# Altium PCB PCB1.PcbDoc
Units mil, origin at the board's own origin, x right, y up, seen from the top; angles counter-clockwise.
Board outline 3765 x 2830 mil, 2 copper layers (Top Layer, Bottom Layer); 31 components, 46 nets, 177 pads, 8 vias.
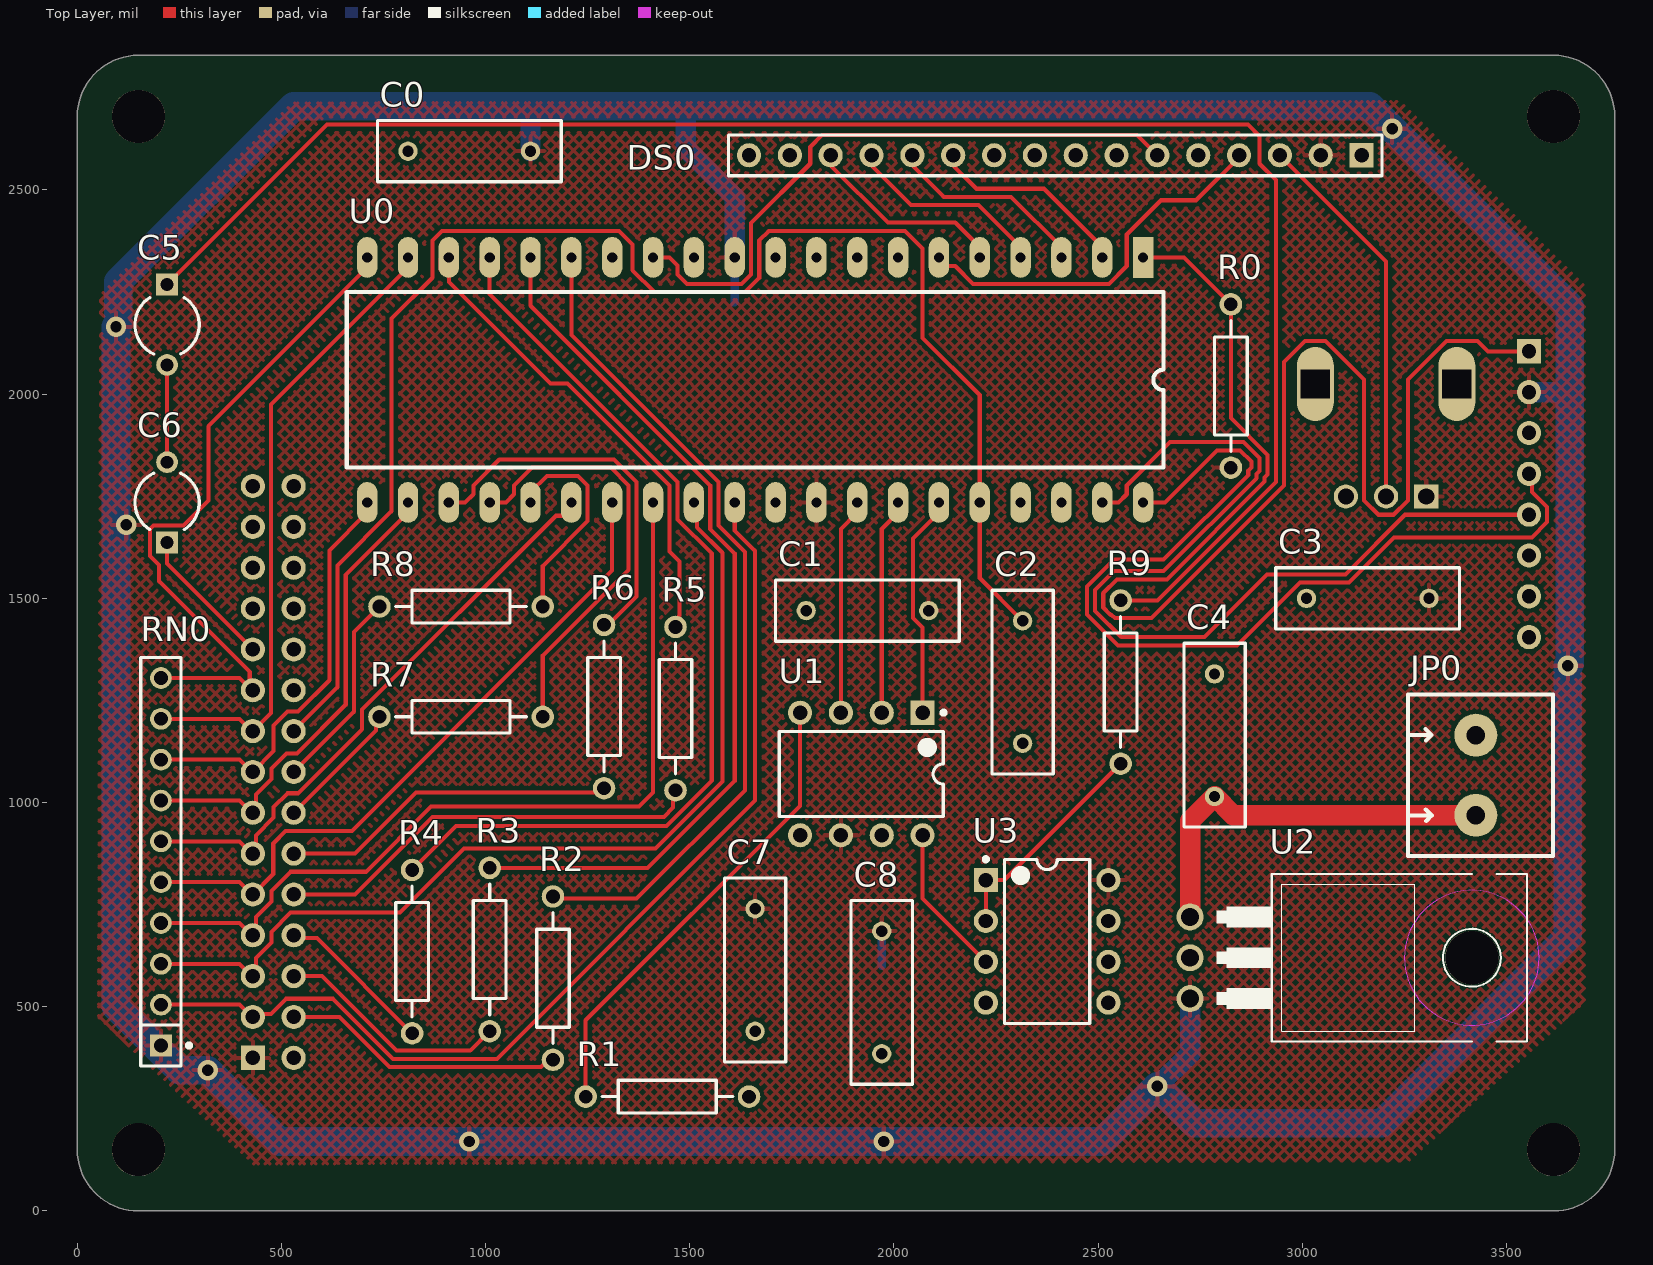
[diagram p0: Top Layer view]
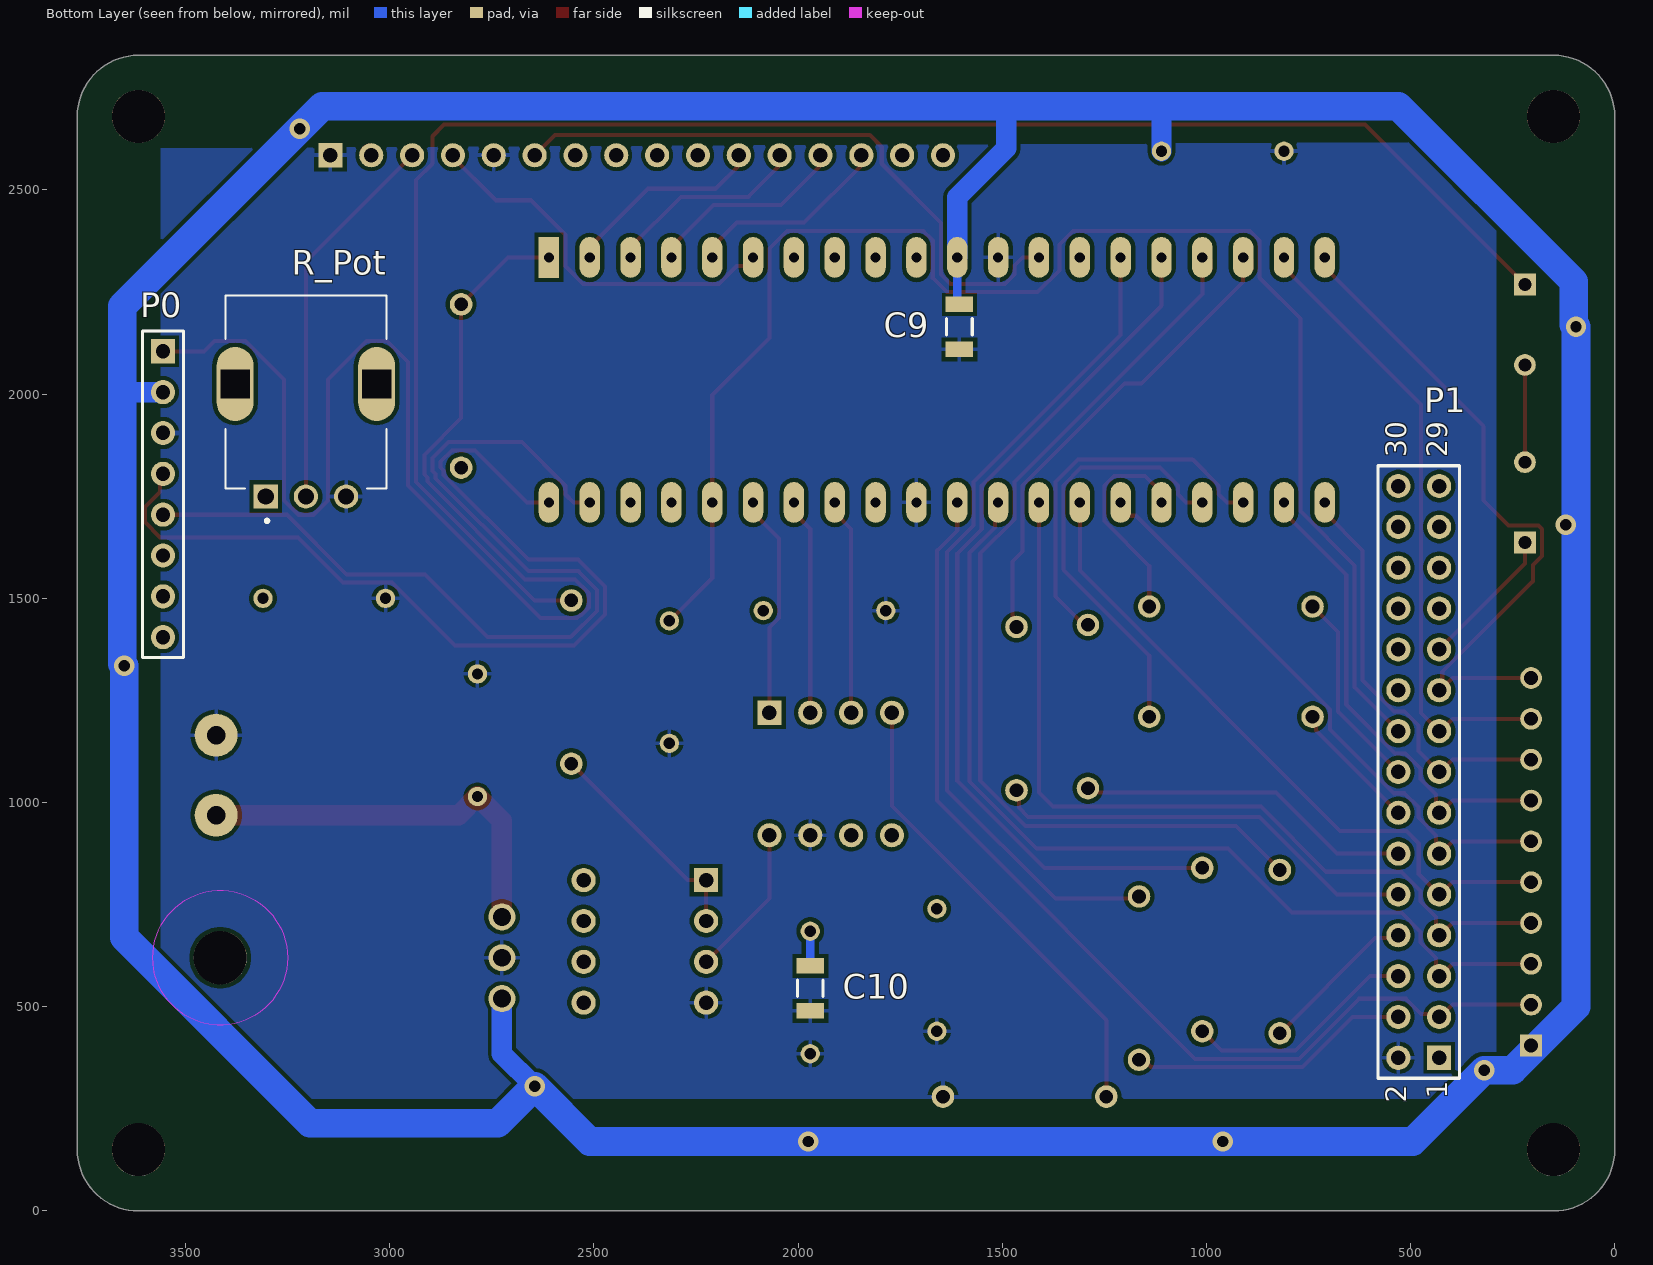
[diagram p1: Bottom Layer view, seen from below]

## Layer stack, top to bottom
Top Solder: solder mask 0.4, Solder Resist, Dk 3.5
Top Layer: signal copper 1.4
Dielectric 1: dielectric 12.6, FR-4, Dk 4.8
Bottom Layer: signal copper 1.4
Bottom Solder: solder mask 0.4, Solder Resist, Dk 3.5

## Board outline
0,150 0,2680 cw(c150,2680) 150,2830 3615,2830 cw(c3615,2680) 3765,2680 3765,150 cw(c3615,150) 3615,0 150,0 cw(c150,150)

## Design rules (kind name [scope] priority, off if disabled: settings)
Clearance [All] p1: gap=10 ignorepadtopadclearanceinfootprint=FALSE except(0: Arc-Hole Track-Hole SMDPad-Hole THPad-Hole Via-Hole Fill-Hole Poly-Hole Region-Hole Text-Hole)
HoleSize [All] p1: absolutevalues=TRUE maxlimit=200 minlimit=1 maxpercent=80.000 minpercent=20.000
PolygonConnect [All] p1: connectstyle=Relief reliefconductorwidth=10 reliefentries=4 polygonreliefangle="90 Angle" airgapwidth=10
RoomDefinition final [InComponentClass('final')] p1: confinementstyle=ConfineIn formatcopy=TRUE lockcomponents=FALSE outline 620,125 3670,125 3670,2245 620,2245
RoutingVias [All] p1: holewidth=28 width=50 viastyle="Through Hole" minholewidth=28 minwidth=50 maxholewidth=28 maxwidth=50
SilkToSolderMaskClearance [IsPad] p1: minsilkscreentomaskgap=2 clearancetoexposedcopper=TRUE
SolderMaskExpansion [All] p1: expansion=4 istentingtop=FALSE
Width [All] p1 off: maxlimit=10 minlimit=10 preferedwidth=10
28 further rules are at their usual default settings.

## Components (designator, comment, footprint, x,y, rotation, side; value= is the part's Value field where it differs from the comment)
C0 "Cap" RAD-0.3 960,2595 r180 top value=0.1uF
C1 "Cap" RAD-0.3 1935,1470 r0 top value=0.1uF
C2 "Cap" RAD-0.3 2315,1295 r90 top value=0.1uF
C3 "Cap" RAD-0.3 3160,1500 r0 top value=0.1uF
C4 "Cap" RAD-0.3 2785,1165 r270 top value=0.33uF
C5 "Cap2" CAPR5-4X5 220,2170 r270 top value=100uF
C6 "Cap2" CAPR5-4X5 220,1735 r90 top value=100uF
C7 "Cap" RAD-0.3 1660,590 r270 top value=0.1uF
C8 "Cap" RAD-0.3 1970,535 r270 top value=0.1uF
C9 "Cap_Kemet_C1206C476M8PACTU_eec" Kemet_C1206C476M8PACTU_0 1605,2165 r270 bottom value=47µF
C10 "Cap_Kemet_C1206C476M8PACTU_eec" Kemet_C1206C476M8PACTU_0 1970,545 r270 bottom value=47µF
DS0 "LCD 44780" HDR1X16 3145,2585 r180 top
JP0 "Power Port" CON2screw 3425,1165 r270 top
P0 "Mplab SNAP" HDR1X8 3555,2105 r270 bottom
P1 "Header 15X2" HDR2X15 430,375 r90 bottom
R0 "Res2" AXIAL-0.4 2825,2020 r90 top value=1K
R1 "Res2" AXIAL-0.4 1445,280 r0 top value=1K
R2 "Res2" AXIAL-0.4 1165,570 r90 top value=510
R3 "Res2" AXIAL-0.4 1010,640 r90 top value=510
R4 "Res2" AXIAL-0.4 820,635 r90 top value=510
R5 "Res2" AXIAL-0.4 1465,1230 r90 top value=510
R6 "Res2" AXIAL-0.4 1290,1235 r90 top value=510
R7 "Res2" AXIAL-0.4 940,1210 r0 top value=510
R8 "Res2" AXIAL-0.4 940,1480 r0 top value=510
R9 "Res2" AXIAL-0.4 2555,1295 r90 top value=100
R_Pot "PT01-D125K2-B103" TRIM_PT01-D125K2-B103 3205,2025 r180 bottom
RN0 "4610X-102-102LF" SIP249W51P254L2535H508Q10P 205,855 r180 top
U0 "PIC18F47K40-I/P" DIP-40 2610,2335 r270 top
U1 "LT1661" LT-N8 1920,1070 r270 top
U2 "LM7805T" TO220 2975,620 r270 top
U3 "LT1490CN8" LT-N8-8 2375,660 r0 top

## Footprints (in the part's own frame and the unit in brackets; to place one, negate y for a bottom-side part, rotate by r counter-clockwise, add the part's x,y. Pads: shape width x height; smd on the part's side, far side on the other; paste and mask are expansions set on the pad)
AXIAL-0.4 [mm] "Axial Device, Thru-Hole; 2 Leads; 0.4 in Pin Spacing"
  round 1.4 hole 0.85: 1(-5.08,0) 2(5.08,0)
  silkscreen extent -4.06,-1.02 4.06,1.02
CAPR5-4X5 [mm] "Capacitor; 2 Leads"
  rect 1.35x1.35 hole 0.8: 1(-2.5,0)
  round 1.35 hole 0.8: 2(2.5,0)
  silkscreen extent -1.69,-2 1.82,2
CON2screw [mil]
  round 105 hole 45: 1(0,0) 2(196,0)
  silkscreen extent -100,-166 296,189
DIP-40 [mil]
  rect 100x50 hole 25: 1(0,0)
  oval 100x50 hole 25: 2(0,-100) 3(0,-200) 4(0,-300) 5(0,-400) 6(0,-500) 7(0,-600) 8(0,-700) 9(0,-800) 10(0,-900) 11(0,-1000) 12(0,-1100) 13(0,-1200) 14(0,-1300) 15(0,-1400) 16(0,-1500) 17(0,-1600) 18(0,-1700) 19(0,-1800) 20(0,-1900) 21(600,-1900) 22(600,-1800) 23(600,-1700) 24(600,-1600) 25(600,-1500) 26(600,-1400) 27(600,-1300) 28(600,-1200) 29(600,-1100) 30(600,-1000) 31(600,-900) 32(600,-800) 33(600,-700) 34(600,-600) 35(600,-500) 36(600,-400) 37(600,-300) 38(600,-200) 39(600,-100) 40(600,0)
  silkscreen extent 85,-1950 515,50
HDR1X8 [mm]
  rect 1.5x1.5 hole 0.9: 1(0,0)
  round 1.5 hole 0.9: 2(2.54,0) 3(5.08,0) 4(7.62,0) 5(10.16,0) 6(12.7,0) 7(15.24,0) 8(17.78,0)
  silkscreen extent -1.27,-1.27 19.05,1.27
HDR1X16 [mm] "Connector; Header; 16 Position"
  rect 1.5x1.5 hole 0.9: 1(0,0)
  round 1.5 hole 0.9: 2(2.54,0) 3(5.08,0) 4(7.62,0) 5(10.16,0) 6(12.7,0) 7(15.24,0) 8(17.78,0) 9(20.32,0) 10(22.86,0) 11(25.4,0) 12(27.94,0) 13(30.48,0) 14(33.02,0) 15(35.56,0) 16(38.1,0)
  silkscreen extent -1.27,-1.27 39.37,1.27
HDR2X15 [mm] "Connector; Header; 15x2 Position"
  rect 1.5x1.5 hole 0.9: 1(0,0)
  round 1.5 hole 0.9: 2(0,2.54) 3(2.54,0) 4(2.54,2.54) 5(5.08,0) 6(5.08,2.54) 7(7.62,0) 8(7.62,2.54) 9(10.16,0) 10(10.16,2.54) 11(12.7,0) 12(12.7,2.54) 13(15.24,0) 14(15.24,2.54) 15(17.78,0) 16(17.78,2.54) 17(20.32,0) 18(20.32,2.54) 19(22.86,0) 20(22.86,2.54) 21(25.4,0) 22(25.4,2.54) 23(27.94,0) 24(27.94,2.54) 25(30.48,0) 26(30.48,2.54) 27(33.02,0) 28(33.02,2.54) 29(35.56,0) 30(35.56,2.54)
  silkscreen extent -1.27,-1.27 36.83,3.81
Kemet_C1206C476M8PACTU_0 [mm]
  rect 0.95x1.7 smd paste+0 mask+0: 1(-1.4,0) 2(1.4,0)
  silkscreen extent -0.5,-0.8 0.5,0.8, body extent -1.6,-0.8 1.6,0.8, height 1.6
LT-N8 [mm] "DIP, 8-Leads, Body 10.16x6.477mm, Pitch 2.54mm"
  rect 1.5x1.5 hole 0.9: 1(-3.81,3.81)
  round 1.5 hole 0.9: 2(-3.81,1.27) 3(-3.81,-1.27) 4(-3.81,-3.81) 5(3.81,-3.81) 6(3.81,-1.27) 7(3.81,1.27) 8(3.81,3.81)
  silkscreen extent -3.93,-5.1 2.65,5.24, body extent -3.95,-5.07 3.95,5.07, height 2.36
LT-N8-8 [mm] "DIP, 8-Leads, Body 10.16x6.48mm, Pitch 2.54mm"
  rect 1.5x1.5 hole 0.9: 1(-3.81,3.81)
  round 1.5 hole 0.9: 2(-3.81,1.27) 3(-3.81,-1.27) 4(-3.81,-3.81) 5(3.81,-3.81) 6(3.81,-1.27) 7(3.81,1.27) 8(3.81,3.81)
  silkscreen extent -3.93,-5.1 2.65,5.23, body extent -3.95,-5.07 3.95,5.07, height 2.36
RAD-0.3 [mm] "Radial Cap, Thru-Hole; 2 Leads; 0.3 in Pin Spacing"
  round 1.2 hole 0.7: 1(-3.81,0) 2(3.81,0)
  silkscreen extent -5.71,-1.91 5.71,1.91
SIP249W51P254L2535H508Q10P [mm]
  rect 1.35x1.35 hole 0.85: 1(0,11.43)
  round 1.35 hole 0.85: 2(0,8.89) 3(0,6.35) 4(0,3.81) 5(0,1.27) 6(0,-1.27) 7(0,-3.81) 8(0,-6.35) 9(0,-8.89) 10(0,-11.43)
  silkscreen extent -1.88,-12.7 1.25,12.7
TO220 [mil]
  round 66 hole 44: 1(-100,-250) 2(0,-250) 3(100,-250)
  round 130 hole 130 unplated: ""(0,440)
  Keep-Out Layer circle w0: c0,440 r165
  Keep-Out Layer circle w0: c0,440 r165
  silkscreen extent -205,-185 205,575, body extent -200,-68 200,113, height 1155
TRIM_PT01-D125K2-B103 [mm]
  rect 1.508x1.508 hole 1: 1(-2.5,-7)
  round 1.508 hole 1: 2(0,-7) 3(2.5,-7)
  oval 2.3x4.6 hole 1.8 square: S1(-4.4,0) S2(4.4,0)
  silkscreen extent -5,-8.61 5,5.5

## Part data
C0 C1 C2 C3 C4 C5 C6 C7 C8: "Capacitor", Publisher="Altium Limited"
  C0 C1 C2 C3 C4 C7 C8: LatestRevisionDate=17-Jul-2002, LatestRevisionNote="Re-released for DXP Platform.", PackageDescription="Radial Cap, Thru-Hole; 2 Leads; 0.3 in Pin Spacing", PackageReference=RAD-0.3, Published=8-Jun-2000
  C5 C6: PackageDescription="Capacitor; 2 Leads", PackageReference=CAPR5-4X5, Published=23-Sep-2002
C9 C10: "CAP 47µF ±20% 10V Ceramic Capacitor X5R 1206 (3216 Metric)", Capacitance=47µF, Digikey Part Number=399-5508-1-ND, Manufacturer=Kemet, Mouser Part Number=80-C1206C476M8P, Package="1206 (3216 metric)", Part Number=C1206C476M8PACTU, Temperature="-55°C to +85°C", Temperature Range High=+85°C, Temperature Range Low=-55°C, Tolerance=±20%, Voltage=10V, ComponentLink1Description=Upverter, ComponentLink1URL=https://upverter.com/upn/revision/2d48458e614f84a3/, ComponentLink2Description=Datasheet, ComponentLink2URL=https://upverter.com/datasheet/f4907562a9ebe4d70bacce08fab44b779a890536.pdf, Digikey Description="CAP 47µF ±20% 10V Ceramic Capacitor X5R 1206 (3216 Metric)", helpURL=https://upverter.com/upn/revision/2d48458e614f84a3/, Ipc Land Pattern Name=CAPC320160X160, Lead Free=yes, Mounting Type="Surface Mount", Price=0.398824992937, RoHS=TRUE, Supplier 1=Digi-Key, Supplier 2=Mouser, Supplier Part Number 1=399-5508-1-ND, Supplier Part Number 2=80-C1206C476M8P
JP0: library part Power
P0: library part "Header 8", "Header, 8-Pin", LatestRevisionDate=17-Jul-2002, LatestRevisionNote="Re-released for DXP Platform.", Publisher="Altium Limited"
P1: "Header, 15-Pin, Dual row", LatestRevisionDate=17-Jul-2002, LatestRevisionNote="Re-released for DXP Platform.", Publisher="Altium Limited"
R0 R1 R2 R3 R4 R5 R6 R7 R8 R9: "Resistor", LatestRevisionDate=17-Jul-2002, LatestRevisionNote="Re-released for DXP Platform.", PackageDescription="Axial Device, Thru-Hole; 2 Leads; 0.4 in Pin Spacing", PackageReference=AXIAL-0.4, Published=8-Jun-2000, Publisher="Altium Limited"
R_Pot: "10k Ohm 1 Gang Linear Through Hole Potentiometer None 1.0 Kierros Carbon 0.05W, 1/20W PC Pins", Package=None, Availability="In Stock", Check_prices=https://www.snapeda.com/parts/PT01-D125K2-B103/CUI+Devices/view-part/?ref=eda, MF="CUI Devices", MP=PT01-D125K2-B103, Price=None, Purchase-URL=https://pricing.snapeda.com/search/part/PT01-D125K2-B103/?ref=eda, SnapEDA_Link=https://www.snapeda.com/parts/PT01-D125K2-B103/CUI+Devices/view-part/?ref=snap
RN0: "Resistor Network", Manufacturer_Name=Bourns, Mouser Part Number=652-4610X-2LF-1K, Arrow Part Number=4610X-102-102LF, Arrow Price/Stock=https://www.arrow.com/en/products/4610x-102-102lf/bourns, Datasheet Link=https://componentsearchengine.com/Datasheets/2/4610X-102-102LF.pdf, Height=5.08mm, Manufacturer_Part_Number=4610X-102-102LF, Mouser Price/Stock=https://www.mouser.co.uk/ProductDetail/Bourns/4610X-102-102LF?qs=Rl1knRB2A4tCodRie8H8UQ%3D%3D
U0: library part PIC18F4620-I/P_1, "Enhanced Flash Microcontroller with 10-Bit A/D and nanoWatt Technology, 64K Flash, 40-Pin PDIP, Industrial Temperature Range", ComponentLink1Description="Manufacturer URL", ComponentLink1URL=http://www.microchip.com/, ComponentLink2Description=Datasheet, ComponentLink2URL=http://ww1.microchip.com/downloads/en/DeviceDoc/39626e.pdf, ComponentLink3Description="Package Specification", ComponentLink3URL=http://www.microchip.com/stellent/groups/techpub_sg/documents/packagingspec/en012702.pdf, DatasheetVersion="revE, May-2008", PackageDescription="40-Lead Plastic Dual In-Line (P) - 600 mil Body [PDIP]", PackageReference=PDIP600-P40, PackageVersion="revBB, Aug-2009"
U2: Package=None, Availability="Not in stock", Check_prices=https://www.snapeda.com/parts/LM7805T/Texas+Instruments/view-part/?ref=eda, MF="Texas Instruments", MP=LM7805T, Price=None, SnapEDA_Link=https://www.snapeda.com/parts/LM7805T/Texas+Instruments/view-part/?ref=snap
U3: "Dual Channel, Operational Amplifier, RRIO, Over-The-Top, 0.18 MHz Typical GBW, 0.06 V/us Typical SR, 2 to 44 V, 8-Pin DIP (N8-8), Commercial", Linear Technology Part Number=LT1490A, Manufacturer="Linear Technology", Channels (#)=2, ComponentLink1Description=Datasheet, ComponentLink1URL=http://cds.linear.com/docs/Datasheet/14901afd.pdf, ComponentLink2Description="Package Specification", ComponentLink2URL=http://cds.linear.com/docs/Packaging/05081510_I_N8.pdf, DatasheetVersion="Rev. D", GBW (MHz) Typical=0.18, Is (mA) Typical=0.04, Mounting Technology="Surface Mount", PackageDescription="8-Lead PDIP, Body 10.16 x 6.48 mm, Pitch 2.54 mm", PackageReference=LT-N8-8, PackageVersion="Rev I", PartNumber=LT1490CN8, SR (V/us) Typical=0.06, Type=VFB, Vos (mV) Typical=0.11, Vs Max (V)=44, Vs Min (V)=2

## Free pads (board coordinates)
  round 130 hole 130 unplated: ""(150,150) ""(150,2680) ""(3615,150) ""(3615,2680)

## Via types
v1: diameter 50, hole 28, Top Layer to Bottom Layer, 8 vias

## Nets (pads, with @x,y where several pads share a name; then routed paths per layer and width w, separated by ;. In a path a pad name is that pad's centre, name@x,y a point inside that pad or via, vN(x,y) a via of type N, cw(c..) or ccw(c..) an arc to the next point about the centre after c; other vN are vias at no path point)
ADCin: C2.2 P1.18 U0.36 | length 3798
  Top Layer w10: P1.18 637.44,1282.44 637.44,1580.87 770,1713.43 770,2185.15 870,2285.15 870,2376.57 893.43,2400 1326.57,2400 1360,2366.57 1360,2303.43 1413.43,2250 1635,2250 1670,2285 1670,2376.57 1693.43,2400 2026.57,2400 2070,2356.57 2070,2137.52 2210,1997.52 U0.36 2210,1550 C2.2
GND: C0.2 C1.1 C2.1 C3.1 C4.1 C7.2 C8.2 C9.2 C10.2 DS0.1 DS0.5 JP0.1 P0.3 P1.2 R1.2 R_Pot.3 U0.12 U0.31 U1.7 U2.2 U3.4 | length 110.6
  Top Layer w10: U0.12 U0.12@1510,2360 ; U0.31@1710,1710 U0.31 ; C1.1 C1.1@1787.5,1467.5
  Bottom Layer w10: U0.12@1510,2310 U0.12 ; U0.31@1710,1710 U0.31 ; C1.1 C1.1@1787.5,1467.5 ; C3.1 C3.1@3012.5,1502.5
LED0: R2.2 U0.15 | length 2062.9
  Top Layer w10: R2.2 1170,765 1370,765 1635,1030 1635,1613.28 1570,1678.28 1570,1784.85 1210,2144.85 U0.15
LED0c: P1.4 R2.1 | length 693
  Top Layer w10: P1.4 642.6,475 765.16,352.44 1135.23,352.44 1152.79,370 R2.1
LED1: R3.2 U0.16 | length 2177.2
  Top Layer w10: R3.2 1396.72,840 1610,1053.28 1610,1610 1550,1670 1550,1776.57 1110,2216.57 U0.16
LED1c: P1.6 R3.1 | length 575.3
  Top Layer w10: P1.6 599.17,575 781.73,392.44 962.44,392.44 R3.1
LED2: R4.2 U0.17 | length 2356
  Top Layer w10: R4.2 927.44,942.44 1442.59,942.44 1553.86,1053.71 1553.86,1609.57 1470,1693.43 1470,1784.85 1010,2244.85 U0.17 ; U0.17@990,2305 U0.17@990,2330
LED2c: P1.8 R4.1 | length 389.4
  Top Layer w10: P1.8 536.74,668.26 586.74,668.26 R4.1
LED3: R5.2 U0.18 | length 1192.5
  Top Layer w10: U0.18@890,2305 U0.18@890,2330 ; U0.18 910,2275 1159.22,2025.78 1200.78,2025.78 1450,1776.57 1450,1615 1475,1590 1475,1458.42 1473.63,1457.05 1473.63,1438.63 R5.2
LED3c: P1.10 R5.1 | length 1062.2
  Top Layer w10: P1.10 680,775 870,965 1436.86,965 1459.3,987.44 1459.3,1024.3 R5.1
LED4: R6.2 U0.23 | length 932
  Top Layer w10: U0.23 950,1735 970,1755 970,1776.57 1033.43,1840 1314.85,1840 1370,1784.85 1370,1505 1350,1485 R6.2@1290,1425
LED4c: P1.12 R6.1 | length 826.3
  Top Layer w10: P1.12 680,875 830,1025 1280,1025 R6.1
LED5: R7.2 U0.24 | length 1059.4
  Top Layer w10: U0.24 1050,1735 1070,1755 1070,1776.57 1113.43,1820 1306.57,1820 1350,1776.57 1350,1570 1140,1360 R7.2
LED5c: P1.14 R7.1 | length 322
  Top Layer w10: P1.14 731.37,1176.37 731.37,1201.37 R7.1
LED6: R8.2 U0.25 | length 533.4
  Top Layer w10: U0.25 1110,1760 1150,1800 1226.57,1800 1250,1776.57 1250,1689.39 1140,1579.39 R8.2
LED6c: P1.16 R8.1 | length 492
  Top Layer w10: P1.16 677.44,1222.44 677.44,1417.44 R8.1
NetC4_2: C4.2 JP0.2 U2.1 | length 978.9
  Top Layer w50: U2.1 2725,955 C4.2 2831,969 JP0.2
NetC5_1: C5.1 R9.2 | length 4212.3
  Top Layer w10: C5.1 611.57,2660 2866.59,2660 2895,2631.59 2895,2564.29 2935,2524.29 2935,1784.96 2645.04,1495 R9.2
NetC5_2: C5.2 C6.2 | length 238.1
  Top Layer w10: C6.2 C5.2
NetDS0_3: DS0.3 R_Pot.2 | length 943.3
  Top Layer w10: DS0.3 3205,2325 R_Pot.2
NetDS0_4: DS0.4 U0.6 | length 941.2
  Top Layer w10: U0.6 2110,2331.91 2128.48,2313.43 2150,2313.43 2193.43,2270 2526.57,2270 2570,2313.43 2570,2391.21 2653.65,2474.87 2739.87,2474.87 DS0.4@2847.5,2582.5
NetDS0_6: DS0.6 U0.13 | length 1554.1
  Top Layer w10: U0.13@1416.85,2341.85 U0.13 1450,2335 1470,2315 1470,2293.43 1493.43,2270 1626.57,2270 1650,2293.43 1650,2419.29 1795,2564.29 1795,2605.71 1824.29,2635 2595,2635 DS0.6
NetDS0_11: DS0.11 U0.2 | length 497.8
  Top Layer w10: DS0.11 2145,2560 2201.91,2503.09 2366.91,2503.09 2510,2360 U0.2
NetDS0_12: DS0.12 U0.3 | length 497.8
  Top Layer w10: DS0.12 2045,2560 2121.91,2483.09 2286.91,2483.09 2410,2360 U0.3
NetDS0_13: DS0.13 U0.4 | length 497.8
  Top Layer w10: DS0.13 1945,2560 2041.91,2463.09 2206.91,2463.09 2310,2360 U0.4
NetDS0_14: DS0.14 U0.5 | length 497.8
  Top Layer w10: DS0.14 1845,2560 1985,2420 2150,2420 2210,2360 U0.5
NetP0_1: P0.1 R0.2 U0.1 | length 3500.7
  Top Layer w10: 2527.62,1462.19 ccw(c2534.66,1469.3) 2529.26,1460.88 2530.29,1460.22 2530.57,1460.04 ; 2527.59,1462.23 2512.44,1477.37 2512.44,1512.63 2546.48,1546.67 2668.43,1546.67 2907.56,1785.8 2907.56,1795.99 2915,1803.43 2915,1851.57 2825,1941.57 R0.2 2710,2335 U0.1 ; 2530.61,1460.02 2532.11,1459.06 cw(c2526.71,1450.63) 2532.45,1458.83 ; 2532.47,1458.81 2541.51,1452.44 2630.77,1452.44 2955,1776.68 2955,2078.75 3006.81,2130.55 3056.74,2130.55 3151.26,2036.03 3151.26,1739.96 3186.49,1704.72 3223.51,1704.72 3258.74,1739.95 3258.74,2036.03 3353.26,2130.55 3429.09,2130.55 3454.64,2105 P0.1
NetP0_4: P0.4 U0.40 | length 2400.3
  Top Layer w10: U0.40@2628.48,1704.22 2610,1722.69 U0.40 2663.28,1735 2790.84,1862.56 2847.44,1862.56 2875,1835 2875,1820 2867.56,1812.56 2867.56,1802.37 2660.19,1595 2538.24,1595 2472.44,1529.2 2472.44,1460.8 2548.24,1385 2840.38,1385 2994,1538.62 3113.97,1538.62 3224.88,1649.53 3562.5,1649.53 3599.53,1686.56 3599.53,1723.44 3562.5,1760.47 3562.5,1797.5 P0.4
NetP0_5: P0.5 U0.39 | length 2300.8
  Top Layer w10: U0.39 2550,1735 2570,1755 2570,1776.57 2675.99,1882.56 2855.73,1882.56 2895,1843.28 2895,1811.72 2887.56,1804.27 2887.56,1794.09 2660.14,1566.67 2538.2,1566.67 2492.44,1520.91 2492.44,1469.09 2556.53,1405 2760,1405 2913.62,1558.62 3105.69,1558.62 3251.79,1704.72 3554.72,1704.72 P0.5
NetR1_1: R1.1 U1.4 | length 1157.5
  Top Layer w10: R1.1 1245,466.97 1770,991.97 U1.4
NetR9_1: R9.1 U3.1 U3.2 | length 548.1
  Top Layer w10: U3.2 U3.1 2270,810 R9.1
NetU0_33: U0.33 U1.3 | length 531.6
  Top Layer w10: U1.3 1870,1670 1910,1710 U0.33
NetU0_34: U0.34 U1.2 | length 531.6
  Top Layer w10: U1.2 1970,1670 2010,1710 U0.34
NetU0_35: U0.35 U1.1 | length 551.1
  Top Layer w10: U1.1 2070,1428.23 2046.38,1451.85 2046.38,1646.38 2110,1710 U0.35
NetU1_8: U1.8 U3.3 | length 374.2
  Top Layer w10: U1.8 2070,765 U3.3
SPKR: C6.1 P1.21 | length 348.6
  Top Layer w10: C6.1 220,1585 P1.21
SW0: P1.3 RN0.2 U0.30 | length 2559.5
  Top Layer w10: RN0.2 397.03,505 427.03,475 P1.3 437.5,482.5 474.53,482.5 511.56,519.53 626.36,519.53 773.45,372.44 1027.44,372.44 1660,1005 1660,1616.57 1610,1666.57 U0.30
SW1: P1.5 RN0.3 U0.29 | length 2334.1
  Top Layer w10: RN0.3 397.03,605 427.03,575 P1.5 437.5,582.5 437.5,619.53 475.47,657.5 475.47,683.44 522.5,730.47 790.47,730.47 947.56,887.56 1415.99,887.56 1580,1051.57 1580,1611.72 1517.65,1674.06 1517.65,1727.35 U0.29
SW2: P1.7 RN0.4 U0.28 | length 2109.4
  Top Layer w10: RN0.4 397.03,705 427.03,675 P1.7 437.5,682.5 437.5,719.53 475.47,757.5 475.47,783.44 522.5,830.47 707.19,830.47 866.72,990 1375.19,990 1410,1024.81 U0.28
SW3: P1.9 RN0.5 U0.27 | length 1656.8
  Top Layer w10: RN0.5 397.03,805 427.03,775 P1.9 480,825 480,900 510.47,930.47 672.5,930.47 1310,1567.97 U0.27
SW4: P1.11 RN0.6 U0.26 | length 1447.1
  Top Layer w10: RN0.6 397.03,905 427.03,875 P1.11 437.5,882.5 437.5,919.53 480.94,962.97 480.94,988.92 514.76,1022.74 540.71,1022.74 697.44,1179.47 697.44,1227.63 1172.16,1702.35 1191.52,1702.35 1210,1720.82 U0.26
SW5: P1.13 RN0.7 U0.22 | length 1170
  Top Layer w10: RN0.7 397.03,1005 427.03,975 P1.13 437.5,982.5 437.5,1019.53 475.47,1057.5 475.47,1083.44 512.03,1120 537.97,1120 657.44,1239.47 657.44,1557.44 810,1710 U0.22
SW6: P1.15 RN0.8 U0.21 | length 1028.6
  Top Layer w10: RN0.8 397.03,1105 427.03,1075 P1.15 480.94,1125.94 480.94,1188.92 514.76,1222.74 540.71,1222.74 617.44,1299.47 617.44,1617.44 710,1710 U0.21
SW7: P1.17 RN0.9 U0.19 | length 1554.8
  Top Layer w10: RN0.9 397.03,1205 427.03,1175 P1.17 474.53,1219.53 474.53,1974.53 810,2310 U0.19
SW8: P1.19 RN0.10 U0.20 | length 1652.8
  Top Layer w10: RN0.10 397.03,1305 P1.19@421.02,1281.01 ; P1.19 422.5,1282.5 422.5,1319.53 200,1542.03 200,1582.21 178.43,1603.79 178.43,1648.2 178.43,1669.36 187.21,1678.15 208.37,1678.15 259.72,1678.15 321.57,1740.01 321.57,1791.35 321.57,1921.57 710,2310 U0.20
VCC: C0.1 C1.2 C3.2 C7.1 C8.1 C9.1 C10.1 DS0.2 P0.2 P1.1 R0.1 R_Pot.1 RN0.1 U0.11 U0.32 U1.6 U2.3 U3.8 | length 12375.8
  Top Layer w10: R0.1@2816.37,1811.37 R0.1 ; R_Pot.1 R_Pot.1@3303.42,1751.42 ; P0.2@3555,2002.99 P0.2
  Top Layer w30: U0.11 U0.11@1610,2360 ; C7.1 C7.1@1664.67,740
  Top Layer w50: RN0.1 RN0.1@206.57,403.43 ; DS0.2 DS0.2@3048.83,2588.83 ; P0.2 P0.2@3556.73,2006.73
  Bottom Layer w10: v1(95,2165) v1@100,2170 ; v1(120,1680) v1@120,1686.57 ; C9.1 C9.1@1610,2225.12 ; v1(3650,1335) v1@3655,1340
  Bottom Layer w20: C9.1@1610,2225.12 U0.11 ; C10.1 C8.1
  Bottom Layer w50: C0.1 1110,2705 ; 1490,2705 1490,2601.74 1610,2481.74 U0.11 ; v1(2645,305) 2725,385 U2.3 ; P0.2 3655,2005
  Bottom Layer w70: v1(95,2165) 95,500 250,345 v1(320,345) 495,170 v1(960,170) v1(1975,170) 2510,170 v1(2645,305) 2735,215 3195,215 3650,670 v1(3650,1335) ; v1@100,2170 100,2275 530,2705 1110,2705 1490,2705 3165,2705 3655,2215 3655,2005 v1@3655,1340
  other v1: 3220,2650
pads on no net: DS0.7 DS0.8 DS0.9 DS0.10 DS0.15 DS0.16 P0.6 P0.7 P0.8 P1.20 P1.22 P1.23 P1.24 P1.25 P1.26 P1.27 P1.28 P1.29 P1.30 R_Pot.S1 R_Pot.S2 U0.7 U0.8 U0.9 U0.10 U0.14 U0.37 U0.38 U1.5 U2. U3.5 U3.6 U3.7

## Polygon pours and split planes (outlines as drawn)
GND on Bottom Layer "GND_L02_P001" (solid, pour order 1): 3560,2602.17 3560,570 3265,275 290,275 290,2460 446.81,2616.81
VCC on Top Layer "VCC_L01_P004" (hatched 45Degree grid 20 track 8, pour order 4): 528.01,2713.01 57.6,2242.6 52.39,473.91 432.43,115.33 3259.98,123.03 3690,512.19 3690,2265 3238.06,2716.94

## Silkscreen, mask and mechanical layers (free items; w line width, h text height)
Mechanical 1:
  the board outline again, w10

## Text inside footprints (layer, text, board x,y; h text height)
P1: Bottom Overlay "1" at 410,275 h50 r270; Bottom Overlay "2" at 510,265 h50 r270; Bottom Overlay "29" at 410,1845 h50 r270; Bottom Overlay "30" at 510,1845 h50 r270
U2: Mechanical 13 "1" at 2975,745.24 h50.1 r270; Mechanical 13 "2" at 2975,645.04 h50.08 r270; Mechanical 13 "3" at 2975,544.98 h50.01 r270